# Altium PCB PCB_ISB_V3.PcbDoc
Units mil, origin at the board's own origin, x right, y up, seen from the top; angles counter-clockwise.
Board outline 3267.72 x 2125.98 mil, 2 copper layers (Top Layer, Bottom Layer); 38 components, 35 nets, 108 pads, 2 vias.
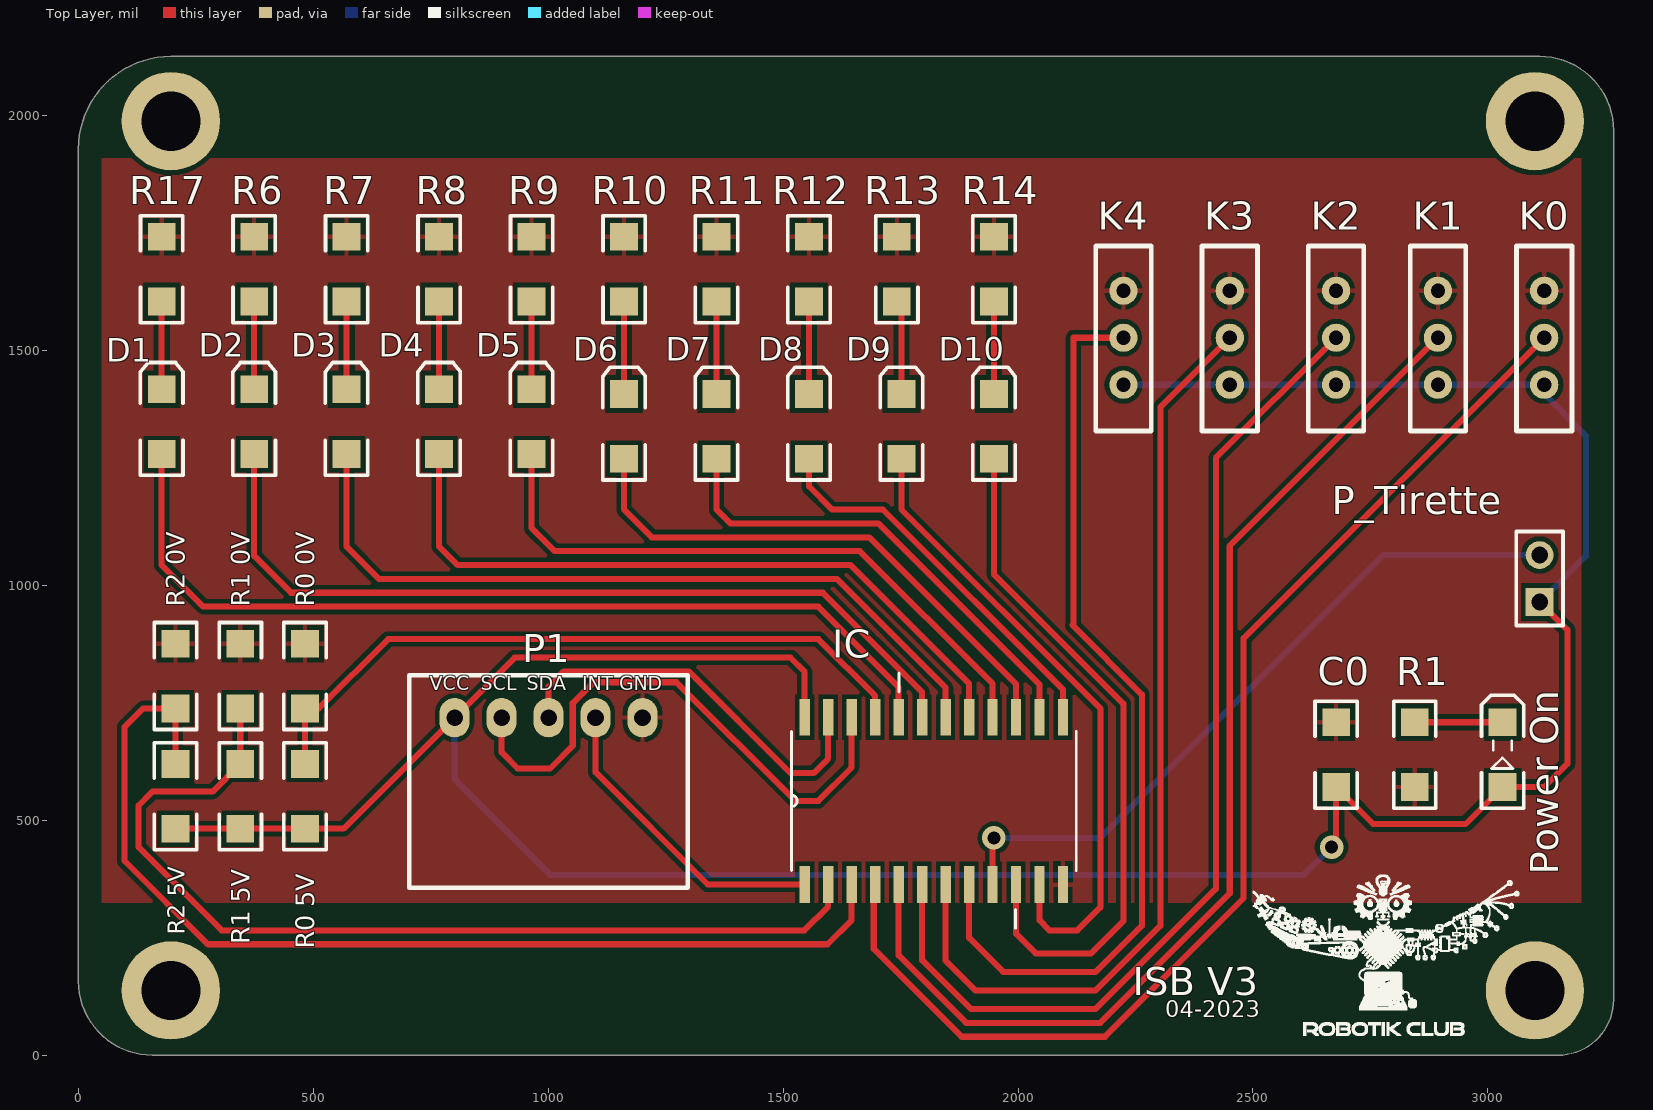
[diagram p0: Top Layer view]
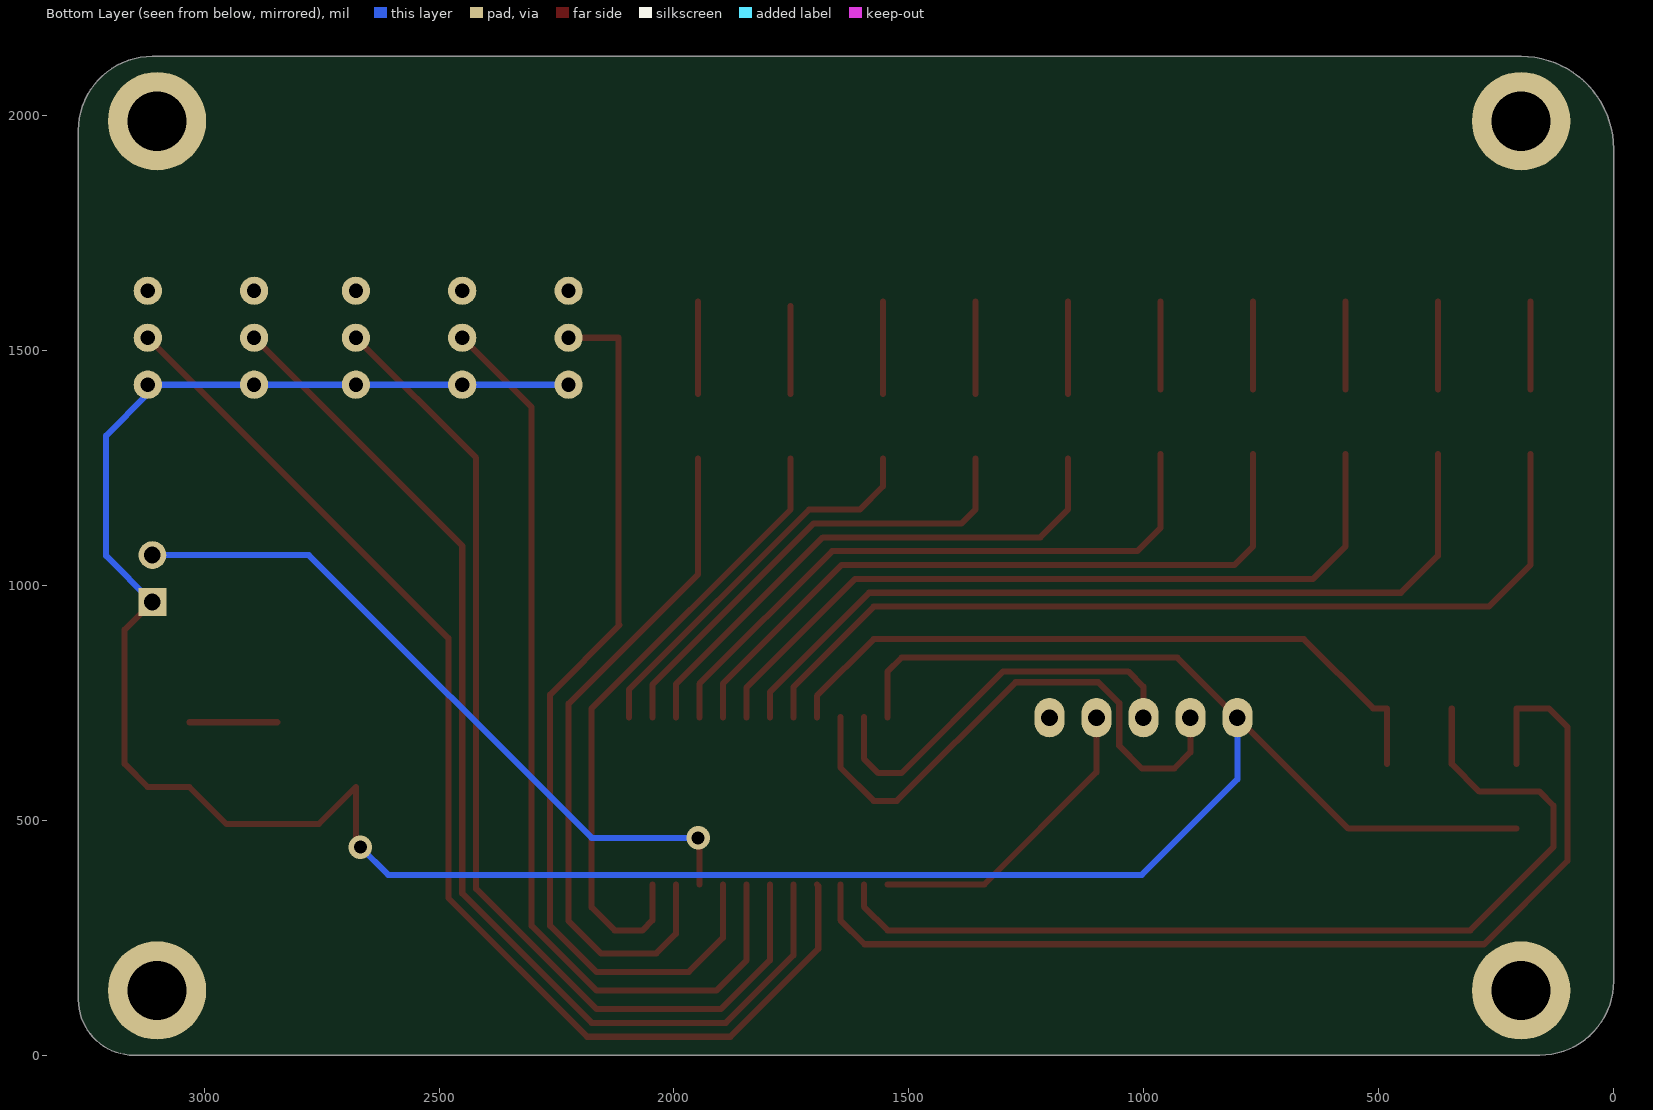
[diagram p1: Bottom Layer view, seen from below]
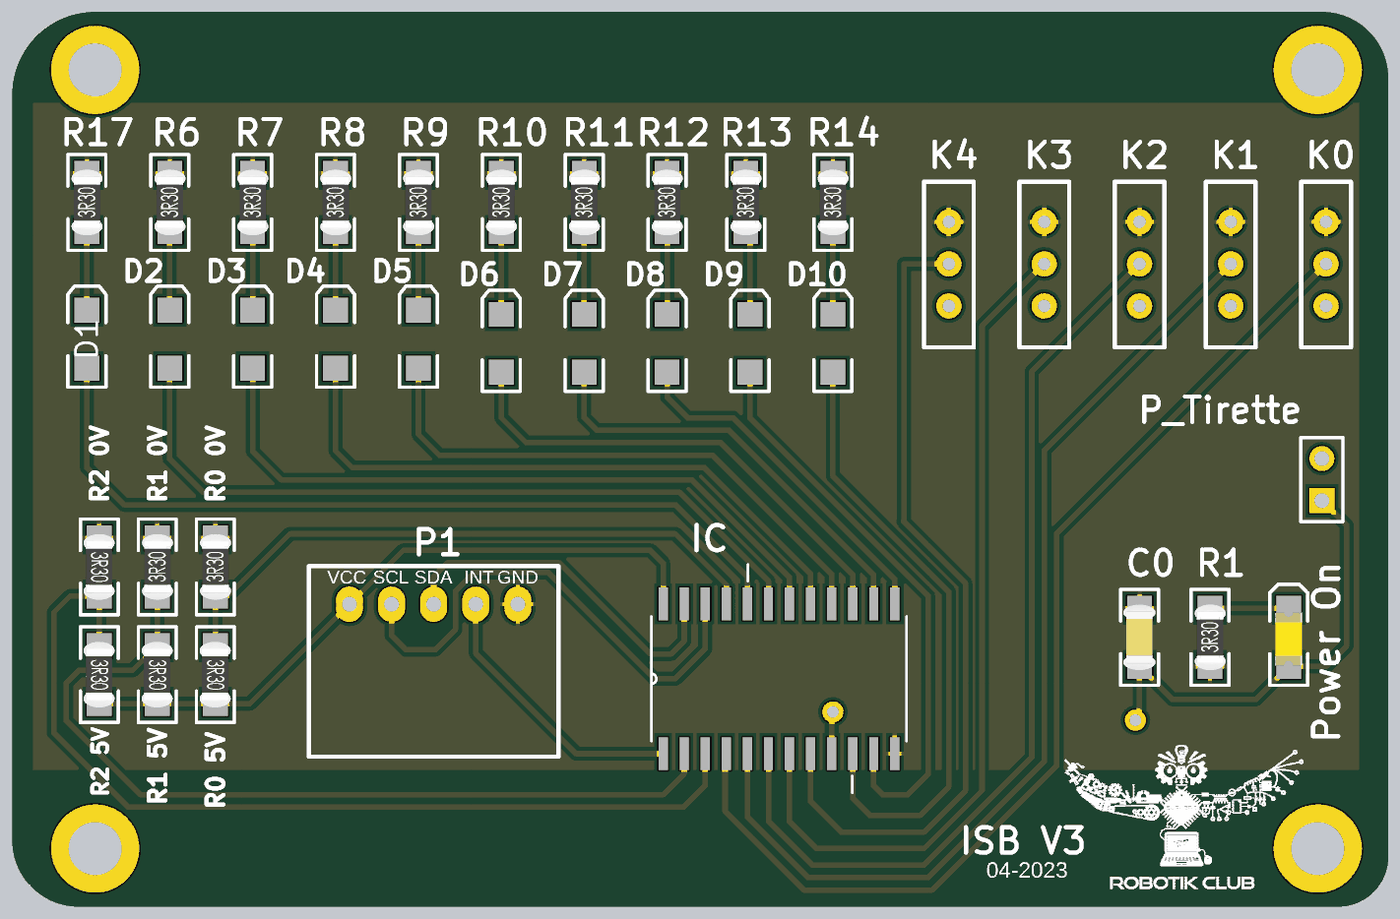
[diagram p2: 3D render of the assembled board from above, using the file's embedded part models]

## Layer stack, top to bottom
Top Solder: solder mask 0.4, Solder Resist, Dk 3.5
Top Layer: signal copper 1.4
Dielectric 1: dielectric 12.6, FR-4, Dk 4.8
Bottom Layer: signal copper 1.4
Bottom Solder: solder mask 0.4, Solder Resist, Dk 3.5

## Board outline
196.85,2125.98 3110.24,2125.98 cw(c3110.24,1968.5) 3267.72,1968.5 3267.72,118.11 cw(c3149.61,118.11) 3149.61,0 157.48,0 cw(c157.48,157.48) 0,157.48 0,1860.24 0,1929.13 cw(c196.85,1929.13)

## Design rules (kind name [scope] priority, off if disabled: settings)
Clearance [All] p1: gap=10
PolygonConnect [All] p1: connectstyle=Relief reliefconductorwidth=10 reliefentries=4 polygonreliefangle="90 Angle" airgapwidth=10
RoutingVias [All] p1: holewidth=27.99 width=50 viastyle="Through Hole" minholewidth=27.99 minwidth=50 maxholewidth=27.99 maxwidth=50
SolderMaskExpansion [All] p1: expansion=4
Width [All] p1: maxlimit=15 minlimit=0.2 preferedwidth=13
30 further rules are at their usual default settings.

## Components (designator, comment, footprint, x,y, rotation, side; value= is the part's Value field where it differs from the comment)
C0 "Cap" "Capacitor 1206" 2677.17,639.76 r270 top
D1 "LED0" 3.2X1.6X1.1 177.17,1348.43 r90 top
D2 "LED0" 3.2X1.6X1.1 374.02,1348.43 r90 top
D3 "LED0" 3.2X1.6X1.1 570.87,1348.43 r90 top
D4 "LED0" 3.2X1.6X1.1 767.72,1348.43 r90 top
D5 "LED0" 3.2X1.6X1.1 964.57,1348.43 r90 top
D6 "LED0" 3.2X1.6X1.1 1161.42,1338.58 r90 top
D7 "LED0" 3.2X1.6X1.1 1358.27,1338.58 r90 top
D8 "LED0" 3.2X1.6X1.1 1555.12,1338.58 r90 top
D9 "LED0" 3.2X1.6X1.1 1751.97,1338.58 r90 top
D10 "LED0" 3.2X1.6X1.1 1948.82,1338.58 r90 top
IC "PCA9555D,118" SOIC127P1032X265-24N 1820.87,541.34 r90 top
"ISB V3" "Comment" Logo_lowres 2775.59,236.22 r0 top
K0 "Switch" SWITCH 3120.08,1427.17 r90 top
K1 "Switch" SWITCH 2893.7,1427.17 r90 top
K2 "Switch" SWITCH 2677.17,1427.17 r90 top
K3 "Switch" SWITCH 2450.79,1427.17 r90 top
K4 "Switch" SWITCH 2224.41,1427.17 r90 top
P1 "Header 5" "JST-XH 5" 1200.79,718.5 r180 top
P_Tirette "Header 2" HDR1X2 3110.24,964.57 r90 top
"Power On" "5V_L" KP-3216SEC 3031.5,639.76 r90 top
"R0 0V" "Res2" "Resistor 1206" 482.28,807.09 r90 top
"R0 5V" "Res2" "Resistor 1206" 482.28,551.18 r270 top
R1 "Res2" "Resistor 1206" 2844.49,639.76 r90 top
"R1 0V" "Res2" "Resistor 1206" 344.49,807.09 r90 top
"R1 5V" "Res2" "Resistor 1206" 344.49,551.18 r270 top
"R2 0V" "Res2" "Resistor 1206" 206.69,807.09 r270 top
"R2 5V" "Res2" "Resistor 1206" 206.69,551.18 r270 top
R6 "Res3" "Resistor 1206" 374.02,1673.23 r90 top
R7 "Res3" "Resistor 1206" 570.87,1673.23 r90 top
R8 "Res3" "Resistor 1206" 767.72,1673.23 r90 top
R9 "Res3" "Resistor 1206" 964.57,1673.23 r90 top
R10 "Res3" "Resistor 1206" 1161.42,1673.23 r90 top
R11 "Res3" "Resistor 1206" 1358.27,1673.23 r90 top
R12 "Res3" "Resistor 1206" 1555.12,1673.23 r90 top
R13 "Res3" "Resistor 1206" 1742.13,1673.23 r90 top
R14 "Res3" "Resistor 1206" 1948.82,1673.23 r90 top
R17 "Res3" "Resistor 1206" 177.17,1673.23 r90 top

## Footprints (in the part's own frame and the unit in brackets; to place one, negate y for a bottom-side part, rotate by r counter-clockwise, add the part's x,y. Pads: shape width x height; smd on the part's side, far side on the other; paste and mask are expansions set on the pad)
3.2X1.6X1.1 [mm] "SMT LED; 2 Flat Leads"
  rect 1.5x1.5 smd: 1(-1.75,0) 2(1.75,0)
  silkscreen extent -2.9,-1.15 3.2,1.15
"Capacitor 1206" [mm]
  rect 1.5x1.5 smd: 1(-1.75,0) 2(1.75,0)
  silkscreen extent -2.89,-1.14 2.89,1.14, body extent -1.98,-0.99 1.98,0.96, height 1.3
HDR1X2 [mm] "Connector; Header; 2 Position"
  rect 1.5x1.5 hole 0.9: 1(0,0)
  round 1.5 hole 0.9: 2(2.54,0)
  silkscreen extent -1.27,-1.27 3.81,1.27
"JST-XH 5" [mm]
  oval 1.624x2.132 hole 0.9: 1(0,0) 2(2.54,0) 3(5.08,0) 4(7.62,0) 5(10.16,0)
  silkscreen extent -2.45,-2.3 12.61,9.2
KP-3216SEC [mm]
  rect 1.5x1.5 smd: 1(-1.75,0) 2(1.75,0)
  silkscreen extent -2.89,-1.14 3.2,1.14, body extent -1.7,-0.79 1.5,0.81, height 1.1
Logo_lowres [mil]
  silkscreen extent -276,-194 291,148
"Resistor 1206" [mm]
  rect 1.5x1.5 smd: 1(-1.75,0) 2(1.75,0)
  silkscreen extent -2.89,-1.14 2.89,1.14, body extent -1.98,-0.95 1.98,0.93, height 0.55
SOIC127P1032X265-24N [mil]
  rect 78x22 smd: 1(-178,275) 2(-178,225) 3(-178,175) 4(-178,125) 5(-178,75) 6(-178,25) 7(-178,-25) 8(-178,-75) 9(-178,-125) 10(-178,-175) 11(-178,-225) 12(-178,-275) 13(178,-275) 14(178,-225) 15(178,-175) 16(178,-125) 17(178,-75) 18(178,-25) 19(178,25) 20(178,75) 21(178,125) 22(178,175) 23(178,225) 24(178,275)
  silkscreen extent -271,-303 272,303
SWITCH [mil] "2 pos switch,  09.03290.01"
  round 60 hole 30: 0(0,0) 1(100,0) 2(200,0)
  silkscreen extent -98,-59 295,59, body extent -98,-59 295,59, height 291

## Part data
C0: "Capacitor"
D1 D2 D3 D4 D5 D6 D7 D8 D9 D10: "Typical INFRARED GaAs LED"
IC: "Integrated Circuit"
K0 K1 K2 K3 K4: "3 pos switch, 09.03290.01"
P1: "Header, 5-Pin"
P_Tirette: "Header, 2-Pin"
"Power On": library part LED2, "Typical RED, GREEN, YELLOW, AMBER GaAs LED"
"R0 0V" "R0 5V" R1 "R1 0V" "R1 5V" "R2 0V" "R2 5V" R6 R7 R8 R9 R10 R11 R12 R13 R14 R17: "Resistor"

## Free pads (board coordinates)
  round 209.45 hole 125.98: Vis(196.85,137.79) Vis(196.85,1988.19) Vis(3100.39,137.8) Vis(3100.39,1988.19)

## Via types
v1: diameter 50, hole 28, Top Layer to Bottom Layer, 2 vias

## Nets (pads, with @x,y where several pads share a name; then routed paths per layer and width w, separated by ;. In a path a pad name is that pad's centre, name@x,y a point inside that pad or via, vN(x,y) a via of type N, cw(c..) or ccw(c..) an arc to the next point about the centre after c; other vN are vias at no path point)
GND: "R0 0V.2" "R1 0V.2" "R2 0V.1" C0.1 IC.12 K0.2 K1.2 K2.2 K3.2 K4.2 P1.1 R1.1 R6.2 R7.2 R8.2 R9.2 R10.2 R11.2 R12.2 R13.2 R14.2 R17.2
NetD1_1: D1.1 IC.20 | length 1976.8
  Top Layer w13: D1.1 177.17,1043.31 265.75,954.72 1574.8,954.72 1745.87,783.66 IC.20
NetD1_2: D1.2 R17.1 | length 187
  Top Layer w13: D1.2 R17.1
NetD2_1: D2.1 IC.19 | length 1812.2
  Top Layer w13: D2.1 374.02,1062.99 452.76,984.25 1584.65,984.25 1795.87,773.03 IC.19
NetD2_2: D2.2 R6.1 | length 187
  Top Layer w13: D2.2 R6.1
NetD3_1: D3.1 IC.18 | length 1659.1
  Top Layer w13: D3.1 570.87,1082.68 639.76,1013.78 1614.17,1013.78 1845.87,782.09 IC.18
NetD3_2: D3.2 R7.1 | length 187
  Top Layer w13: D3.2 R7.1
NetD4_1: D4.1 IC.17 | length 1517.6
  Top Layer w13: D4.1 767.72,1082.68 807.09,1043.31 1643.7,1043.31 1895.87,791.14 IC.17
NetD4_2: D4.2 R8.1 | length 187
  Top Layer w13: D4.2 R8.1
NetD5_1: D5.1 IC.16 | length 1347.2
  Top Layer w13: D5.1 964.57,1122.05 1013.78,1072.83 1663.39,1072.83 1945.87,790.35 IC.16
NetD5_2: D5.2 R9.1 | length 187
  Top Layer w13: D5.2 R9.1
NetD6_1: D6.1 IC.15 | length 1167
  Top Layer w13: D6.1 1161.42,1161.42 1220.47,1102.36 1683.07,1102.36 1995.87,789.57 IC.15
NetD6_2: D6.2 R10.1 | length 196.9
  Top Layer w13: D6.2 R10.1
NetD7_1: D7.1 IC.14 | length 1019.7
  Top Layer w13: D7.1 1358.27,1161.42 1387.8,1131.89 1702.76,1131.89 2045.87,788.78 IC.14
NetD7_2: D7.2 R11.1 | length 196.9
  Top Layer w13: D7.2 R11.1
NetD8_1: D8.1 IC.13 | length 837.8
  Top Layer w13: D8.1 1555.12,1210.63 1604.33,1161.42 1712.6,1161.42 2095.87,778.15 IC.13
NetD8_2: D8.2 R12.1 | length 196.9
  Top Layer w13: D8.2 R12.1
NetD9_1: D9.1 IC.11 | length 1365
  Top Layer w13: D9.1 1751.97,1161.42 2175.2,738.19 2175.2,314.96 2125.98,265.75 2066.93,265.75 2045.87,286.81 IC.11
NetD9_2: D9.2 R13.1 | length 187
  Top Layer w13: D9.2 R13.1@1751.97,1594.49
NetD10_1: D10.1 IC.10 | length 1478
  Top Layer w13: D10.1 1948.82,1023.62 2224.41,748.03 2224.41,285.43 2155.51,216.54 2037.4,216.54 1995.87,258.07 IC.10
NetD10_2: D10.2 R14.1 | length 196.9
  Top Layer w13: D10.2 R14.1
NetIC_1: IC.1 P1.2 | length 660.5
  Top Layer w13: P1.2 1100.79,601.97 1339.42,363.34 IC.1
NetIC_2: "R1 0V.1" "R1 5V.1" IC.2 | length 2069.2
  Top Layer w13: 344.49,738.19 344.49,620.08 285.43,561.02 157.48,561.02 127.95,531.5 127.95,442.91 305.12,265.75 1545.28,265.75 1595.87,316.34 IC.2
NetIC_3: "R2 0V.2" "R2 5V.1" IC.3 | length 2246
  Top Layer w13: 206.69,620.08 206.69,738.19 137.8,738.19 98.43,698.82 98.43,413.39 275.59,236.22 1594.49,236.22 1645.87,287.6 IC.3
NetIC_4: IC.4 K0.1 | length 2582.9
  Top Layer w13: IC.4 1692.91,360.39 1692.91,226.38 1879.92,39.37 2185.04,39.37 2480.31,334.65 2480.31,887.4 K0.1
NetIC_5: IC.5 K1.1 | length 2395.4
  Top Layer w13: IC.5 1745.87,212.8 1889.76,68.9 2175.2,68.9 2450.79,344.49 2450.79,1084.25 K1.1
NetIC_6: IC.6 K2.1 | length 2214.4
  Top Layer w13: IC.6 1795.87,202.17 1899.61,98.43 2165.35,98.43 2421.26,354.33 2421.26,1271.26 K2.1
NetIC_7: IC.7 K3.1 | length 2015.4
  Top Layer w13: IC.7 1845.87,201.38 1909.45,137.8 2165.35,137.8 2303.15,275.59 2303.15,1379.53 K3.1
NetIC_8: IC.8 K4.1 | length 1972.4
  Top Layer w13: IC.8 1895.87,249.8 1968.5,177.17 2165.35,177.17 2263.78,275.59 2263.78,767.72 2116.14,915.35 2117.72,916.93 2117.72,1527.17 K4.1
NetIC_9: IC.9 P_Tirette.2 | length 1511.2
  Top Layer w13: IC.9 1945.87,459.65 v1(1948.82,462.6)
  Bottom Layer w13: v1(1948.82,462.6) 2175.2,462.6 2777.17,1064.57 P_Tirette.2
NetIC_21: "R0 0V.1" "R0 5V.1" IC.21 | length 1488.4
  Top Layer w13: 482.28,620.08 482.28,738.19 511.81,738.19 659.45,885.83 1574.8,885.83 1695.87,764.76 IC.21
NetIC_22: IC.22 P1.4 | length 1203.6
  Top Layer w13: P1.4 900.79,644.49 935.04,610.24 1003.94,610.24 1052.32,658.62 1052.32,749.41 1096.84,793.93 1273,793.93 1525.59,541.34 1574.8,541.34 1645.87,612.4 IC.22
NetIC_23: IC.23 P1.3 | length 864.9
  Top Layer w13: P1.3 1000.79,784.25 1033.46,816.93 1299.21,816.93 1515.75,600.39 1564.96,600.39 1595.87,631.3 IC.23
"NetPower On_2": "Power On.2" R1.2 | length 187
  Top Layer w13: R1.2 3031.5,708.66
VCC: "Power On.1" "R0 5V.2" "R1 5V.2" "R2 5V.2" C0.2 IC.24 K0.0 K1.0 K2.0 K3.0 K4.0 P1.5 P_Tirette.1 | length 6206.7
  Top Layer w13: 206.69,482.28 344.49,482.28 482.28,482.28 564.57,482.28 P1.5 928.74,846.46 1515.75,846.46 1545.87,816.34 IC.24 ; v1@2677.17,452.76 C0.2 2755.91,492.13 2952.76,492.13 3031.5,570.87 3120.08,570.87 3169.29,620.08 3169.29,905.51 P_Tirette.1
  Bottom Layer w13: P1.5 800.79,587.01 1003.94,383.86 2608.27,383.86 v1(2667.32,442.91) ; K4.0 K3.0 K2.0 K1.0 K0.0 3120.08,1407.48 3208.66,1318.9 3208.66,1062.99 P_Tirette.1

## Polygon pours and split planes (outlines as drawn)
GND on Top Layer "GND" (solid, remove dead copper, pour order 0): 49.21,1909.45 108.27,1909.45 3198.82,1909.45 3198.82,324.8 49.21,324.8

## Silkscreen, mask and mechanical layers (free items; w line width, h text height)
Top Overlay:
  text "VCC" at 748.03,767.72 h50
  text "SCL" at 856.3,767.72 h50
  text "SDA" at 954.72,767.72 h50
  text "INT" at 1072.83,767.72 h50
  text "GND" at 1151.57,767.72 h50
  text "04-2023" at 2312.99,68.9 h60
Mechanical 13:
  lines w10: 0,147.64 ccw(c147.64,147.64) 147.64,0 3149.61,0 ccw(c3149.38,120.35) 3267.72,98.43 3267.72,1968.5 ccw(c3105.31,1963.58) 3100.39,2125.98 196.85,2125.98 ccw(c201.77,1924.21) 0,1919.29 0,147.64